# Altium PCB PCB1.PcbDoc
Units mm, origin at the board's own origin, x right, y up, seen from the top; angles counter-clockwise.
Board outline 209.93 x 191.52 mm, 2 copper layers (Top Layer, Bottom Layer); 51 components, 46 nets, 178 pads, 24 vias.
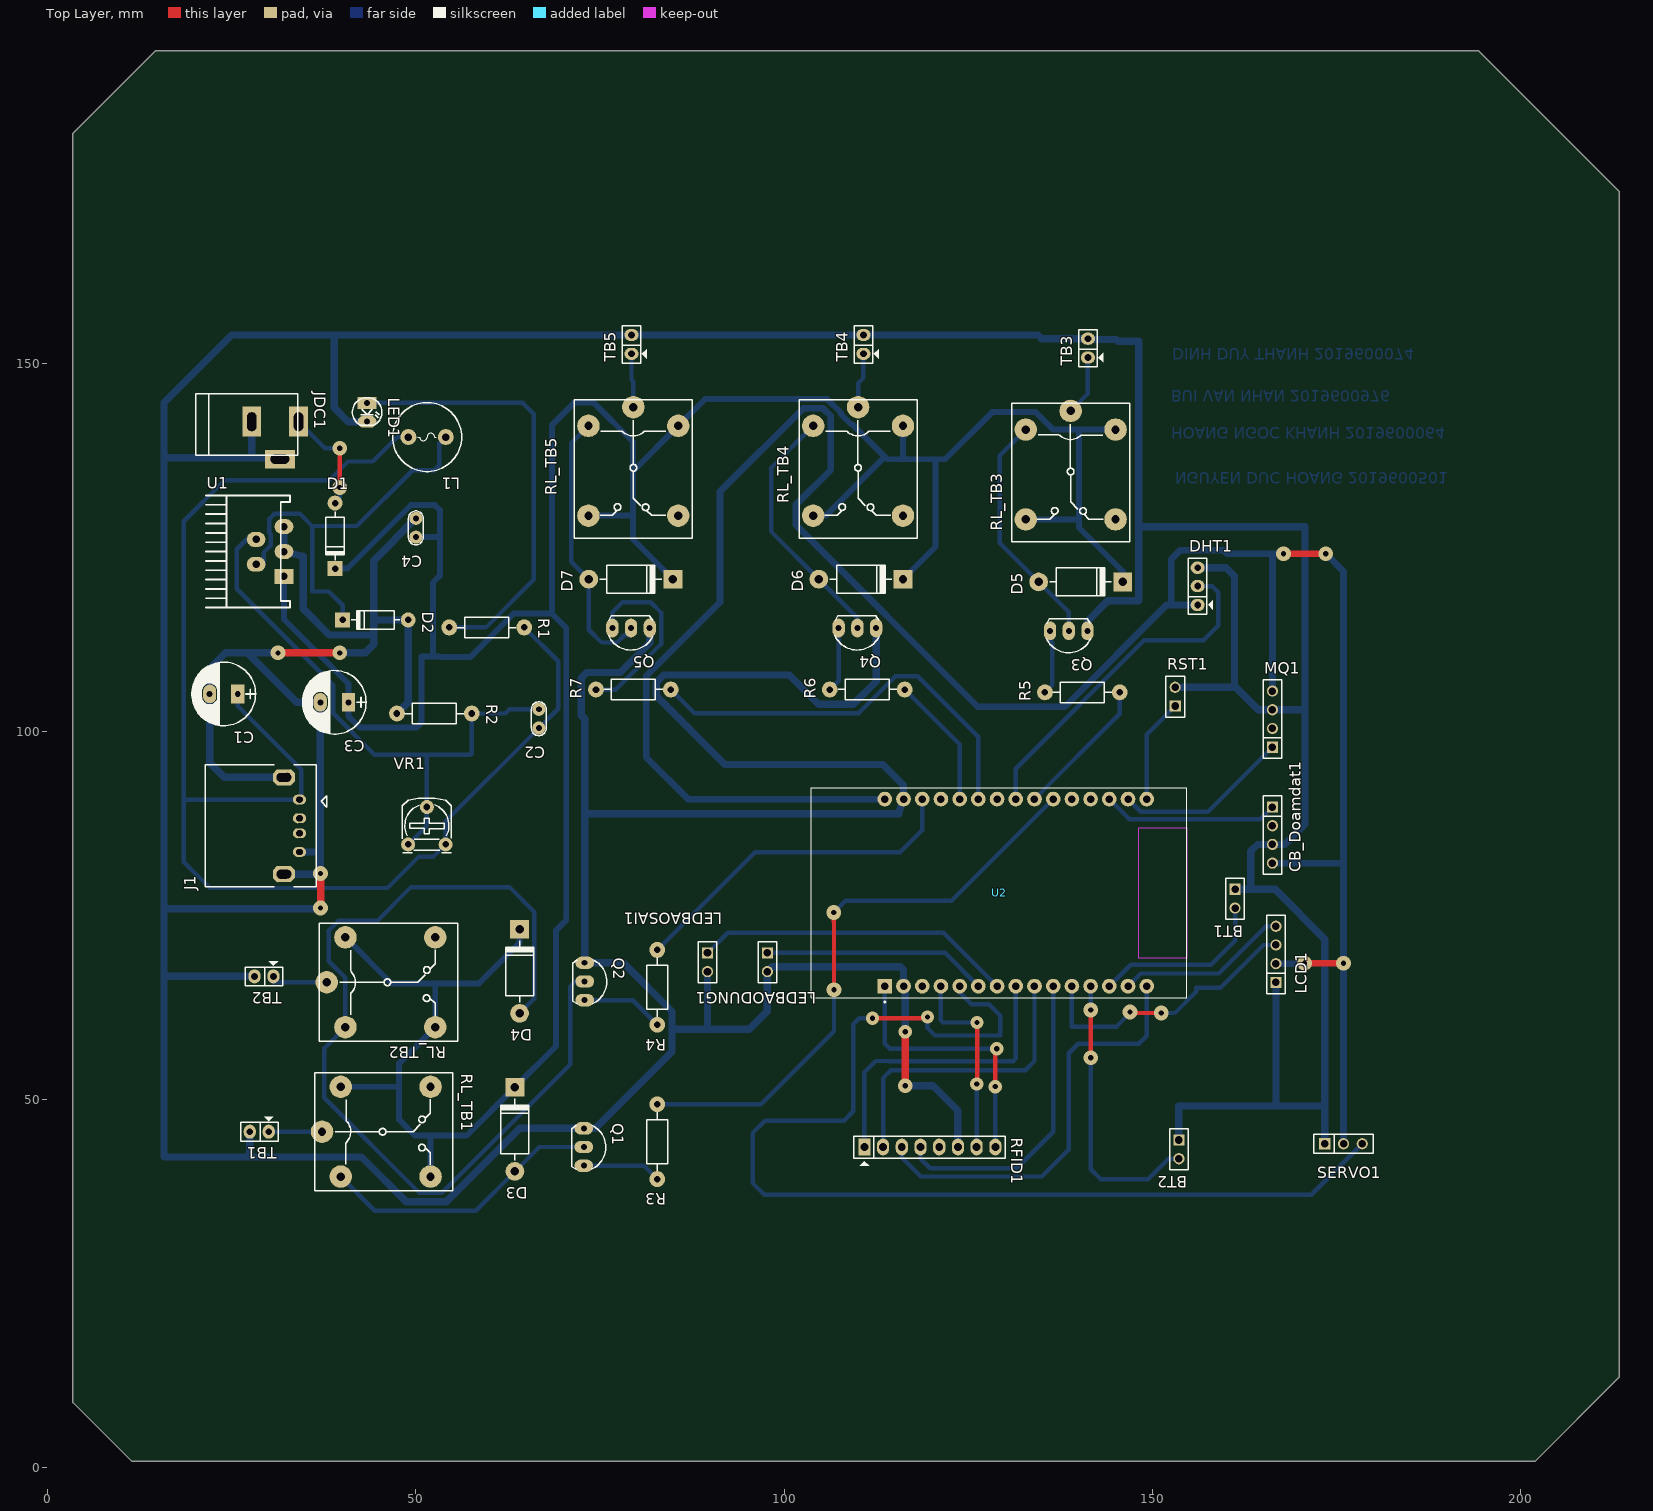
[diagram p0: Top Layer view]
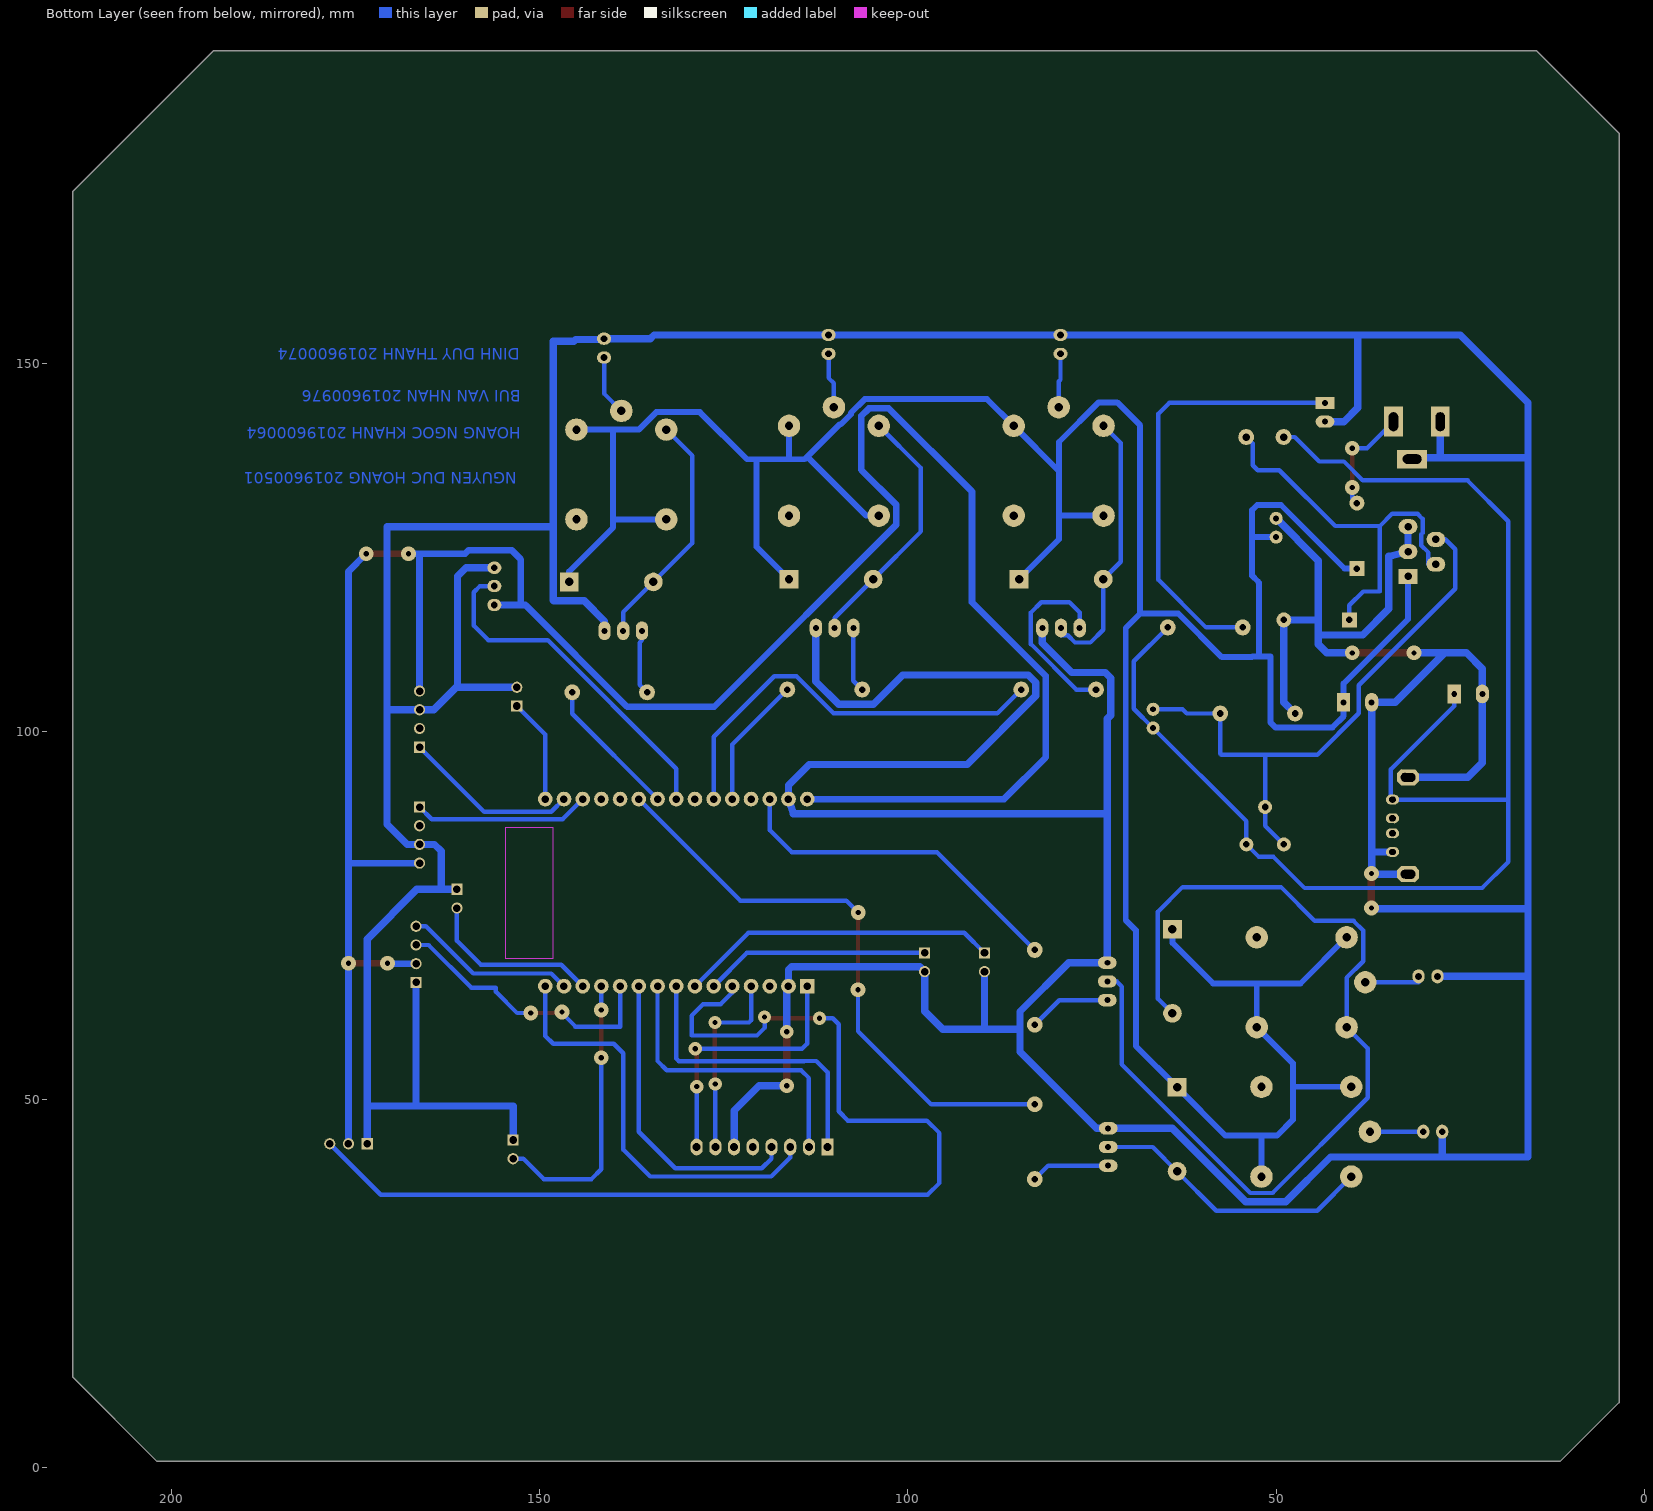
[diagram p1: Bottom Layer view, seen from below]
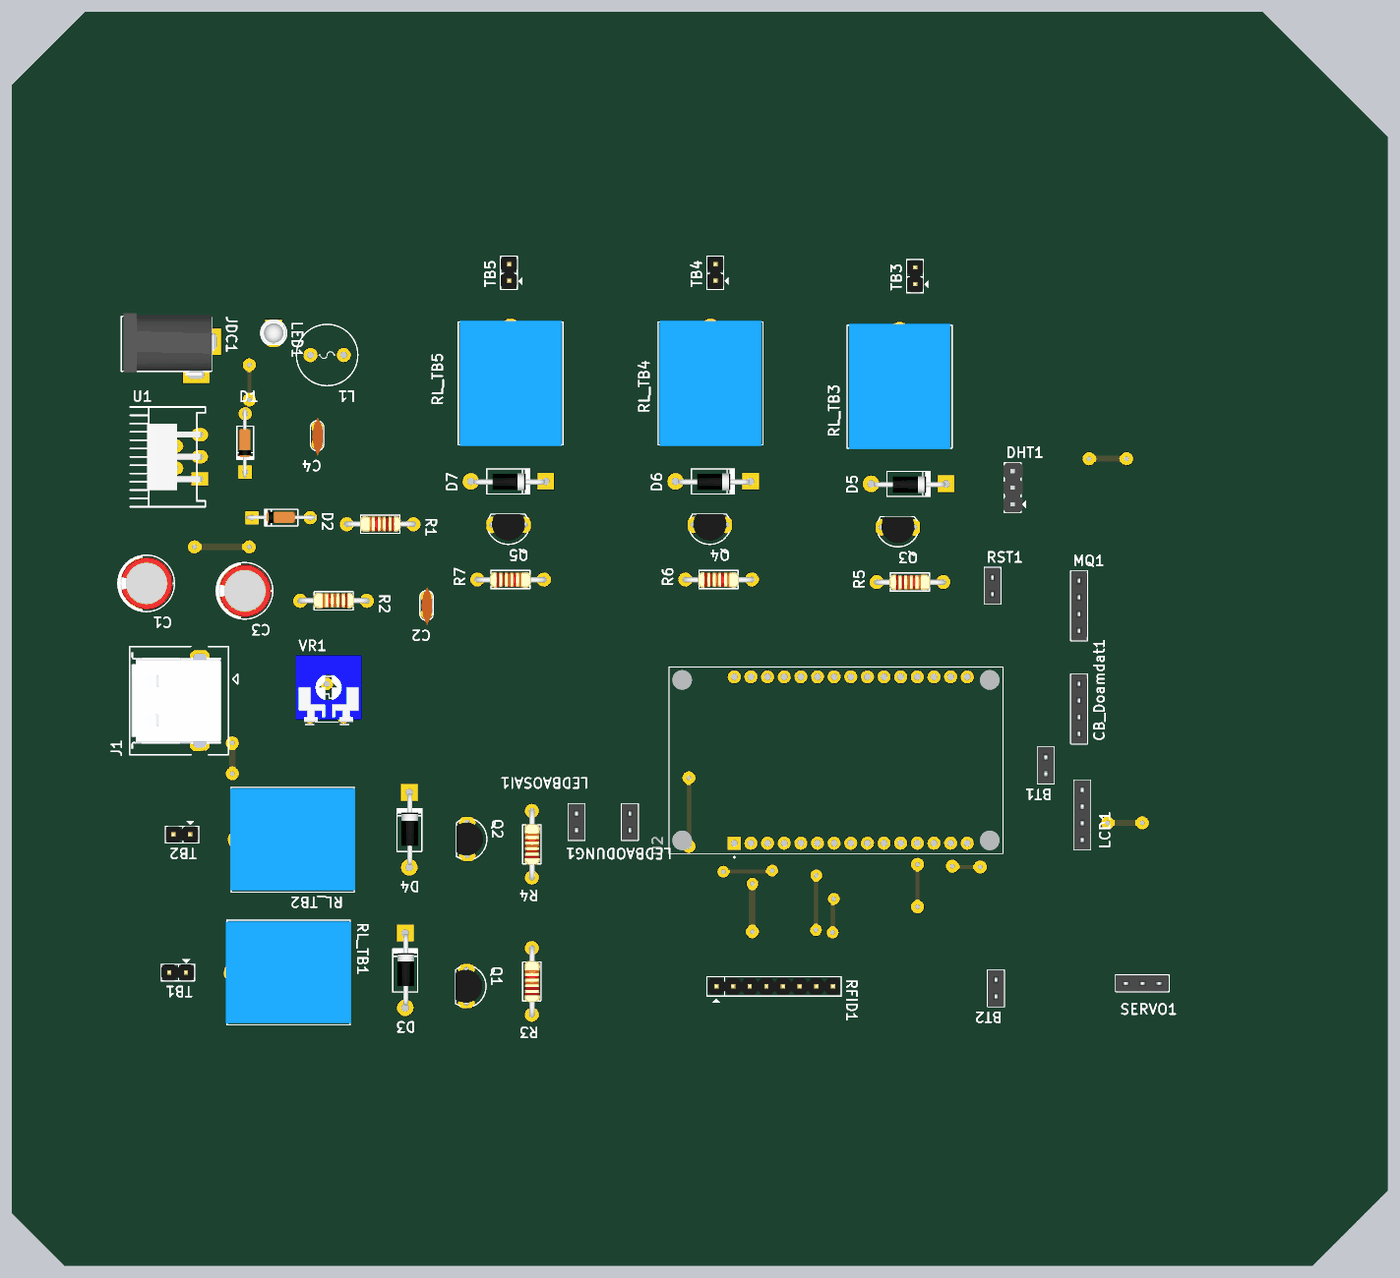
[diagram p2: 3D render of the assembled board from above, using the file's embedded part models]

## Layer stack, top to bottom
Top Layer: signal copper 0.0356
Dielectric: dielectric 0.32, FR-4, Dk 4.8
Bottom Layer: signal copper 0.0356

## Board outline
3.429,8.89 11.43,0.889 201.93,0.889 213.36,12.319 213.36,173.355 194.31,192.405 14.605,192.405 3.429,181.229

## Design rules (kind name [scope] priority, off if disabled: settings)
Clearance [All] p1: gap=0.4
PolygonConnect [All] p1: connectstyle=Relief reliefconductorwidth=0.254 reliefentries=4 polygonreliefangle="90 Angle"
RoutingLayers [All] p1: top layer_v5=FALSE bottom layer_v5=TRUE
RoutingVias [All] p1: holewidth=0.711 width=1.27 viastyle="Through Hole" minholewidth=0.711 minwidth=1.27 maxholewidth=0.711 maxwidth=1.27
SilkscreenOverComponentPads [All] p1: minsilkscreentomaskgap=0.254
SolderMaskExpansion [All] p1: expansion=0.102
Width GND [InNet('GND')] p1: maxlimit=1 minlimit=1 preferedwidth=1
Width VCC [InNet('VCC')] p2: maxlimit=0.9 minlimit=0.9 preferedwidth=0.9
Width 12V [InNet('+12')] p3: maxlimit=0.8 minlimit=0.8 preferedwidth=0.8
Width NET [All] p4: maxlimit=0.6 minlimit=0.6 preferedwidth=0.6
26 further rules are at their usual default settings.

## Components (designator, comment, footprint, x,y, rotation, side; value= is the part's Value field where it differs from the comment)
BT1 "JP2" JP2-C1T 161.218,78.569 r270 top
BT2 "JP2" JP2-C1T 153.598,44.533 r270 top
C1 "220uF/50V" CP1.5/3.4 25.808,105.104 r180 top
C2 "104" CN1 66.696,103.017 r270 top
C3 "220uF/50V" CP1.5/3.4 40.822,103.969 r180 top
C4 "104" CN1 49.998,128.932 r270 top
CB_Doamdat1 "JP4" JP4-C1T 166.298,89.745 r270 top
D1 "1N4007" D1A 39.016,131.012 r90 top
D2 "1N5448" D1A 48.95,115.145 r0 top
D3 "1N4007" D2A 63.438,51.702 r270 top
D4 "1N4007" D2A 64.073,73.165 r270 top
D5 "1N4007" D2A 145.98,120.304 r180 top
D6 "1N4007" D2A 116.135,120.685 r180 top
D7 "1N4007" D2A 84.893,120.685 r180 top
DHT1 "Jumper 3" JP3 156.138,119.717 r90 top
J1 "8492121" USB-C1 29.872,87.324 r90 top
JDC1 "Jac DC" DC-IN 30.888,139.521 r0 top
L1 "330uH" L01 51.522,139.981 r180 top
LCD1 "JP4" JP4-C1T 166.772,65.933 r90 top
LED1 "LED" LED-3 43.362,144.609 r270 top
LEDBAODUNG1 "JP2" JP2-C1T 97.718,69.933 r270 top
LEDBAOSAI1 "JP2" JP2-C1T 89.59,69.933 r270 top
MQ1 "JP4" JP4-C1T 166.298,97.873 r90 top
Q1 "C1815" QTO-92 72.792,43.581 r270 top
Q2 "C1815" QTO-92 72.919,66.06 r270 top
Q3 "C1815" QTO-92 138.642,113.669 r180 top
Q4 "C1815" QTO-92 109.94,114.05 r180 top
Q5 "C1815" QTO-92 79.206,114.05 r180 top
R1 "330" R1/2W 54.538,114.129 r0 top
R2 "330" R1/2W 47.426,102.445 r0 top
R3 "220" R1/2W 82.768,49.388 r270 top
R4 "220" R1/2W 82.768,70.343 r270 top
R5 "220" R1/2W 145.569,105.314 r180 top
R6 "220" R1/2W 116.359,105.695 r180 top
R7 "220" R1/2W 84.609,105.695 r180 top
RFID1 "JP8 PIN" JP8 110.892,43.581 r0 top
RL_TB1 "Relay1" RL_SPDT_10A 37.252,45.661 r0 top
RL_TB2 "Relay1" RL_SPDT_10A 37.887,65.949 r0 top
RL_TB3 "Relay1" RL_SPDT_10A 138.896,143.53 r270 top
RL_TB4 "Relay1" RL_SPDT_10A 110.035,144.038 r270 top
RL_TB5 "Relay1" RL_SPDT_10A 79.523,144.038 r270 top
RST1 "JP2" JP2-C1T 153.09,103.461 r90 top
SERVO1 "JP3" JP3-C1T 173.41,44.025 r0 top
TB1 "Jumper 2" JP2 30.013,45.661 r180 top
TB2 "Jumper 2" JP2 30.648,66.743 r180 top
TB3 "Jumper 2" JP2 141.245,150.769 r90 top
TB4 "Jumper 2" JP2 110.765,151.277 r90 top
TB5 "Jumper 2" JP2 79.269,151.277 r90 top
U1 "LM2976" DIP5-T 27.84,124.408 r90 top
U2 "ESP32-DEVKIT-V1" MODULE_ESP32_DEVKIT_V1 129.18,78.125 r90 top
VR1 "10K" VR 48.95,84.665 r0 top

## Footprints (in the part's own frame and the unit in brackets; to place one, negate y for a bottom-side part, rotate by r counter-clockwise, add the part's x,y. Pads: shape width x height; smd on the part's side, far side on the other; paste and mask are expansions set on the pad)
CN1 [mil]
  round 70 hole 31: 1(0,0) 2(100,0)
  silkscreen extent -40,-40 141,40, body extent -60,-30 170,37, height 265
CP1.5/3.4 [mil] "Tu hoa 220->470uF,16V, 470uF/16V,25V"
  rect 70x100 hole 32: 1(0,0)
  oval 70x100 hole 32: 2(150,0)
  silkscreen extent -95,-170 245,170, body extent -85,-157 230,157, height 446
D1A [mil] "Diode 1A, W 100mil, L 350mil"
  round 80 hole 35: 1(0,0)
  rect 80x80 hole 35: 2(-350,0)
  silkscreen extent -305,-50 -45,50, body extent -386,-33 34,36, height 84
D2A [mil] "Diode 2A, W 150mil, L 450mil"
  round 100 hole 45: 1(450,0)
  rect 100x100 hole 45: 2(0,0)
  silkscreen extent 61,-75 391,75, body extent 5,-47 435,54, height 100
DC-IN [mil] "Jac DC input"
  rect 100x160 hole 50 slot 100 at 90 deg: 1(125,100) 2(-125,100)
  rect 160x100 hole 50 slot 100 at 0 deg: 3(25,-100)
  silkscreen extent -425,-80 120,250, body extent -410,-105 134,269, height 434
DIP5-T [mil]
  rect 80x100 hole 40: 1(-132,-167.09)
  oval 80x100 hole 40: 2(-67,-18) 3(1,-167) 4(66,-18) 5(134,-167)
  round 59.06 on Top Paste: ""(1,100)
  silkscreen extent -299,-200 301,250, body extent -199,-175 201,150, height 859
JP2 [mil]
  oval 65x75 hole 36: 1(0,0) 2(101,0)
  silkscreen extent -50,-81 150,50, body extent -48,-50 148,48, height 323
JP2-C1T [mm] "2 row, straight, gold plating"
  rect 1.52x1.52 hole 1.02: 1(0,0)
  round 1.52 hole 1.02: 2(2.54,0)
  silkscreen extent -1.52,-1.27 4.06,1.27, body extent -1.52,-1.25 4.06,1.25, height 8.51
JP3 [mil] "Jumper 3"
  oval 65x75 hole 36: 1(-100,0) 2(1,0) 3(99,0)
  silkscreen extent -150,-81 150,50, body extent -150,-60 150,55, height 355
JP3-C1T [mm] "3 row, straight, gold plating"
  rect 1.52x1.52 hole 1.02: 1(0,0)
  round 1.52 hole 1.02: 2(2.54,0) 3(5.08,0)
  silkscreen extent -1.52,-1.27 6.6,1.27, body extent -1.52,-1.25 6.6,1.25, height 8.51
JP4-C1T [mm] "4 row, straight, gold plating"
  rect 1.52x1.52 hole 1.02: 1(0,0)
  round 1.52 hole 1.02: 2(2.54,0) 3(5.08,0) 4(7.62,0)
  silkscreen extent -1.52,-1.27 9.14,1.27, body extent -1.52,-1.25 9.14,1.25, height 8.51
JP8 [mil] "JP8"
  rect 65x90 hole 42: 1(0,0)
  oval 65x90 hole 42: 2(100,0) 3(200,0) 4(300,0) 5(400,0) 6(500,0) 7(600,0) 8(700,0)
  silkscreen extent -56,-100 752,57, body extent -48,-50 748,48, height 323
L01 [mil] "Inductor"
  round 85 hole 40: 1(-100,0) 2(100,0)
  silkscreen extent -184,-184 184,184
LED-3 [mil] "LED 2 PIN, 3ly Only colour"
  rect 65x100 hole 32: 1(0,0)
  oval 65x100 hole 32: 2(100,0)
  silkscreen extent -29,-78 118,79, body extent -25,-75 113,75, height 217
MODULE_ESP32_DEVKIT_V1 [mm]
  rect 2x2 / inner round 2 / far side rect 2x2 hole 1.02: 1(-12.7,15.515)
  round 2 hole 1.02: 2(-12.7,12.975) 3(-12.7,10.435) 4(-12.7,7.895) 5(-12.7,5.355) 6(-12.7,2.815) 7(-12.7,0.275) 8(-12.7,-2.265) 9(-12.7,-4.805) 10(-12.7,-7.345) 11(-12.7,-9.885) 12(-12.7,-12.425) 13(-12.7,-14.965) 14(-12.7,-17.505) 15(-12.7,-20.045) 16(12.7,-20.045) 17(12.7,-17.505) 18(12.7,-14.965) 19(12.7,-12.425) 20(12.7,-9.885) 21(12.7,-7.345) 22(12.7,-4.805) 23(12.7,-2.265) 24(12.7,0.275) 25(12.7,2.815) 26(12.7,5.355) 27(12.7,7.895) 28(12.7,10.435) 29(12.7,12.975) 30(12.7,15.515)
  round 3 on Top Paste: ""(-12.28,23.475) ""(-12.28,-23.475) ""(12.23,23.475) ""(12.23,-23.475)
  Keep-Out Layer region: 8.78,-25.475 -8.91,-25.475 -8.91,-18.985 8.78,-18.985
  Keep-Out Layer region: 8.78,-25.475 -8.91,-25.475 -8.91,-18.985 8.78,-18.985
  silkscreen extent -14.95,-25.47 14.23,25.47
QTO-92 [mil] "TO-92"
  oval 66x100 hole 32: 1(-100,0) 2(0,0) 3(100,0)
  silkscreen extent -117,-65 120,118, body extent -109,-66 109,95, height 245
R1/2W [mil] "R 1/2W, 2 pin, 300mil"
  round 85 hole 35: 1(0,0) 2(400,0)
  silkscreen extent 42,-55 356,55, body extent -12,-45 414,49, height 91
RL_SPDT_10A [mil] "Relay SPDT, 5 pin, 10A,W 650mil, L 800mil, H 800mil"
  round 120 hole 45: 1(0,0) 2(580,240) 3(580,-240) 4(100,-240) 5(100,240)
  silkscreen extent -40,-315 700,315, body extent -46,-304 706,306, height 602
USB-C1 [mm] "THT, USB 2.0 A Connector, 4Pin, Body 15.8 x14.5mm"
  oval 1.35x1.8 hole 0.8 slot 0.9 at 90.92 deg rot 0.92: 1(3.429,-4.318) 2(0.889,-4.318) 3(-1.143,-4.318) 4(-3.683,-4.318)
  oct 2.2x3 hole 1.2 slot 2 at 90.92 deg rot 0.92: 4(-6.697,-2.206) 4(6.443,-2.206)
  silkscreen extent -8.38,-8 8.13,8.51, body extent -8.03,-5.46 7.77,8.24, height 6.97
VR [mil] "Resistor Variable"
  round 75 hole 35: 1(0,0) 2(100,200) 3(200,0)
  silkscreen extent -31,-44 231,246, body extent -87,-30 307,372, height 165

## Part data
BT1 BT2 CB_Doamdat1 LCD1 LEDBAODUNG1 LEDBAOSAI1 MQ1 RST1 SERVO1: "WR-PHD 2.54 mm Angled Socket Header"
C1 C3: library part CP4, "Cap 1000uF/16V - 220uF/50V"
C2 C4: library part CN1, "Cap np  1pF - 472pF"
D1 D2 D3 D4 D5 D6 D7: library part D1A, "Diode 1A"
DHT1: library part JP3
J1: library part USB-4, "THT USB 2.0 A Connector WE-EPLE"
JDC1: library part DCIN, "Jac DC input"
L1: library part L1, "Inductor"
LED1: "LED Single colour Green and Red"
Q1 Q2 Q3 Q4 Q5: "NPN 600mW, ECB"
R1 R2 R3 R4 R5 R6 R7: library part R1/4W, "Resistor 1/4W"
RFID1: library part JP8
RL_TB1 RL_TB2 RL_TB3 RL_TB4 RL_TB5: library part "Relay 1", "Relay SPDT,10A - 12VDC 5 Pin"
TB1 TB2 TB3 TB4 TB5: library part "JP 2"
U1: library part LM2596
U2: "Dual core, Wi-Fi: 2.4 GHz up to 150 Mbits/s,BLE (Bluetooth Low Energy) and legacy Bluetooth, 32 bits, Up to 240 MHz"
VR1: library part VR, "Var Resistor"

## Via types
v1: diameter 2, hole 0.711, Top Layer to Bottom Layer, 17 vias
v2: diameter 1.8, hole 0.711, Top Layer to Bottom Layer, 7 vias

## Nets (pads, with @x,y where several pads share a name; then routed paths per layer and width w, separated by ;. In a path a pad name is that pad's centre, name@x,y a point inside that pad or via, vN(x,y) a via of type N, cw(c..) or ccw(c..) an arc to the next point about the centre after c; other vN are vias at no path point)
3V3: RFID1.8 U2.1 | length 36.4
  Top Layer w0.6: v2(128.672,51.78) v2@128.672,56.751
  Bottom Layer w0.6: U2.1 113.665,57.63 114.369,56.926 v2(128.847,56.926) ; RFID1.8 v2(128.672,51.78)
+12: C3.1 C4.2 D1.2 D3.2 D4.2 D5.2 D6.2 D7.2 RL_TB1.3 RL_TB1.5 RL_TB2.3 RL_TB2.5 RL_TB3.3 RL_TB3.5 RL_TB4.3 RL_TB4.5 RL_TB5.3 RL_TB5.5 U1.1 | length 467.5
  Bottom Layer w0.8: U1.1@32.338,121.055 U1.1 32.084,115.243 40.822,106.505 C3.1 40.822,102.089 42.346,100.565 50.093,100.565 50.779,101.251 50.779,110.207 52.296,110.207 ; D1.2 40.698,122.122 49.331,130.755 52.558,130.755 53.245,130.068 53.245,121.151 52.455,120.361 ; RL_TB1.5 47.649,51.757 ; RL_TB2.5 46.691,65.782 52.846,65.782 ; C4.2 53.183,126.392 ; RL_TB1.3@51.858,39.691 RL_TB1.3@51.984,39.691 ; RL_TB1.3 RL_TB1.3@51.984,39.691 ; 52.296,120.202 52.296,110.207 ; 53.189,110.207 52.296,110.207 ; 53.3,110.096 57.363,110.096 63.276,116.009 68.457,116.009 ; D4.2 64.073,71.307 58.547,65.782 52.846,65.782 ; RL_TB5.3 79.413,129.306 79.47,129.363 ; D7.2 79.47,126.108 79.47,129.363 ; RL_TB4.3 105.656,129.306 113.659,137.309 ; 116.131,137.356 RL_TB4.5 ; D6.2 120.54,125.09 120.54,136.958 ; 116.529,136.958 115.883,136.958 ; RL_TB3.3 139.867,128.798 140.027,128.958 ; RL_TB3.5 140.027,140.99 ; D5.2 145.98,121.722 140.027,127.675 140.027,128.958 ; RL_TB1.3@51.984,39.691 51.984,45.107 53.471,45.107 53.482,45.118 ; 52.846,65.782 52.619,65.555 RL_TB2.3 47.717,54.951 47.717,47.278 49.877,45.118 53.482,45.118 ; 53.482,45.118 56.854,45.118 D3.2 69.041,57.305 69.041,73.006 70.413,74.378 70.413,114.053 68.457,116.009 ; 68.457,116.009 68.457,141.561 71.581,144.685 74.096,144.685 79.47,139.311 79.47,135.349 ; 79.47,129.363 79.47,135.349 ; 79.47,135.349 RL_TB5.5 89.243,145.122 105.846,145.122 107.711,143.257 107.711,143.075 109.072,141.714 109.254,141.714 113.659,137.309 ; 113.659,137.309 114.01,136.958 115.883,136.958 ; 115.883,136.958 120.54,136.958 ; 120.54,136.958 121.832,136.958 128.238,143.364 134.155,143.364 136.529,140.99 140.027,140.99 ; 140.027,128.958 140.027,140.99
BUTTON1: BT1.2 U2.13 | length 24.1
  Bottom Layer w0.6: U2.13 147.053,68.333 157.967,68.333 161.218,71.584 BT1.2
BUTTON2: BT2.2 U2.12 | length 38.6
  Top Layer w0.6: v1@141.605,55.728 v1(141.629,55.704) v1(141.629,62.175)
  Bottom Layer w0.6: U2.12 141.605,62.199 v1(141.629,62.175) ; v1(141.629,55.704) 141.629,40.548 142.945,39.232 149.432,39.232 152.193,41.993 BT2.2
D16: LEDBAODUNG1.1 U2.6 | length 30.5
  Bottom Layer w0.6: LEDBAODUNG1.1 121.857,69.933 U2.6
D17: LEDBAOSAI1.1 U2.7 | length 43.5
  Bottom Layer w0.6: LEDBAOSAI1.1 92.347,72.69 121.64,72.69 U2.7
DHT: DHT1.2 U2.23 | length 47.3
  Bottom Layer w0.6: U2.23 131.445,94.948 148.906,112.409 156.97,112.409 158.937,114.376 158.937,118.906 158.101,119.742 DHT1.2
DOAM: CB_Doamdat1.1 U2.18 | length 24
  Bottom Layer w0.6: U2.18 146.876,88.094 164.647,88.094 CB_Doamdat1.1
EN: RST1.1 U2.16 | length 14.2
  Bottom Layer w0.6: U2.16 149.225,99.596 RST1.1
GND: BT1.1 BT2.1 C1.2 C3.2 C4.1 CB_Doamdat1.3 D2.1 DHT1.3 J1.4 JDC1.2 JDC1.3 LCD1.1 LED1.2 LEDBAODUNG1.2 LEDBAOSAI1.2 MQ1.3 Q1.1 Q2.1 Q3.1 Q4.1 Q5.1 R2.1 RFID1.6 RST1.2 SERVO1.1 TB1.2 TB2.2 TB3.2 TB4.2 TB5.2 U1.3 U1.5 U2.2 U2.29 | length 1068.6
  Top Layer w1: v1(31.273,110.675) v1(39.642,110.675) ; v1(37.058,76.035) v1(37.058,80.734) ; v1(116.427,51.891) v2(116.427,59.238)
  Bottom Layer w1: 15.849,137.191 27.713,137.191 ; 15.979,66.743 TB2.2 ; 27.448,42.247 TB1.2 ; JDC1.2 27.713,140.791 27.713,137.191 ; v1(31.273,110.675) 27.105,110.675 ; JDC1.3 31.313,137.191 27.713,137.191 ; J1.4@32.078,80.627 36.951,80.627 v1(37.058,80.734) 37.012,80.78 C3.2 33.811,103.969 27.105,110.675 ; J1.4@32.078,93.767 23.973,93.767 21.998,95.742 C1.2 21.998,108.53 24.143,110.675 27.105,110.675 ; U1.5 U1.3 34.7,123.781 34.7,116.644 38.252,113.092 44.272,113.092 ; J1.4@33.965,83.637 34.19,83.641 36.843,83.641 ; v1@36.975,75.952 15.787,75.952 ; 38.911,153.781 38.911,143.939 40.781,142.069 LED1.2 ; v1(39.642,110.675) 43.004,110.675 43.113,110.675 44.272,111.833 44.272,113.092 ; 44.316,115.145 D2.1 48.95,103.969 R2.1 ; 49.84,36.141 54.128,36.141 64.108,46.121 Q1.1 74.375,46.121 84.764,56.51 84.764,59.573 ; 49.978,36.141 48.703,36.141 42.616,42.228 15.787,42.228 15.787,75.952 ; C4.1 44.272,123.206 44.272,113.092 ; Q2.1@72.928,68.6 Q2.1 ; 75.366,68.6 76.066,68.6 ; Q5.1 81.746,112.021 77.733,108.008 73.182,108.008 72.445,107.271 72.445,102.191 72.928,101.708 72.928,88.508 ; 89.59,59.638 LEDBAOSAI1.2 ; Q4.1 112.48,106.793 109.402,103.715 104.652,103.715 100.69,107.677 83.646,107.677 82.629,106.66 82.629,104.834 91.952,95.511 113.39,95.511 116.205,92.696 U2.29 115.545,88.831 73.25,88.831 72.928,88.508 ; v1(116.427,51.891) 120.207,51.891 123.592,48.506 RFID1.6 ; v2(116.427,59.238) 116.427,65.203 U2.2 116.205,67.64 115.779,68.066 98.391,68.066 LEDBAODUNG1.2 97.718,62.037 95.254,59.573 84.764,59.573 ; Q3.1 141.182,114.972 143.946,117.736 148.072,117.736 ; 145.105,153.228 141.351,153.228 TB3.2 134.98,153.334 134.472,153.842 TB4.2 TB5.2 24.987,153.842 15.787,144.642 15.787,75.952 ; 145.354,152.979 148.162,152.979 148.162,127.68 ; 148.162,117.826 148.162,127.68 ; RST1.2 161.3,106.001 ; BT2.1 153.598,49.157 173.069,49.157 ; DHT1.3 159.999,122.232 161.142,121.089 161.142,106.159 161.3,106.001 ; BT1.1 163.369,78.569 ; 166.772,49.306 LCD1.1 ; 170.407,102.953 MQ1.3 164.348,102.953 161.3,106.001 ; SERVO1.1 173.41,49.02 ; 173.41,49.259 173.41,71.813 166.654,78.569 163.369,78.569 ; Q2.1 76.066,68.6 ; Q2.1 72.919,88.5 72.928,88.508 ; 76.066,68.6 78.147,68.6 84.764,61.983 84.764,59.573 ; 148.162,127.68 148.274,127.792 150.63,127.792 151.376,127.792 170.718,127.792 170.718,87.395 167.988,84.665 CB_Doamdat1.3 164.266,84.665 163.369,83.768 163.369,78.569
IRQ: RFID1.5
MISO: RFID1.4 U2.10 | length 42
  Bottom Layer w0.6: RFID1.4 118.512,42.002 119.816,40.698 131.576,40.698 136.525,45.646 U2.10
MOSI: RFID1.3 U2.15 | length 58.1
  Bottom Layer w0.6: RFID1.3 115.972,42.154 118.546,39.58 134.98,39.58 138.637,43.238 138.637,56.299 139.924,57.586 148.152,57.586 149.225,58.659 149.225,61.163 149.225,61.608 U2.15
MQ135: MQ1.1 U2.17 | length 24
  Bottom Layer w0.6: U2.17 148.4,89.11 157.535,89.11 MQ1.1
NetC1_1: C1.1 C2.2 J1.1 L1.2 R1.2 VR1.3 | length 200.8
  Bottom Layer w0.6: 18.462,82.311 18.462,128.559 23.996,134.093 38.22,134.093 40.788,136.661 44.127,136.661 47.446,139.981 L1.2 ; C1.1 25.808,103.461 34.415,94.854 34.415,90.978 J1.1 18.517,90.753 18.514,90.75 18.514,82.259 22.026,78.747 46.131,78.747 50.351,82.967 52.332,82.967 VR1.3 54.03,87.811 C2.2 69.308,103.089 69.308,109.519 R1.2
NetC2_1: C2.1 R2.2 U1.4 VR1.1 VR1.2 | length 79.9
  Bottom Layer w0.6: U1.4 27.028,126.084 25.685,124.741 25.685,119.373 38.765,106.293 38.765,102.47 44.415,96.82 51.639,96.82 ; VR1.1 51.49,87.205 VR1.2 51.49,96.671 51.639,96.82 ; 57.417,96.82 51.639,96.82 ; 57.586,96.989 R2.2 62.133,102.445 62.705,103.017 C2.1
NetD1_1: D1.1 JDC1.1 | length 14.8
  Top Layer w0.6: v1(39.652,133.12) v1(39.652,138.471)
  Bottom Layer w0.6: JDC1.1 37.653,138.471 v1(39.652,138.471) ; D1.1 39.652,131.648 v1(39.652,133.12)
NetD2_2: D2.2 L1.1 U1.2 | length 54.9
  Bottom Layer w0.6: U1.2 29.316,122.706 29.316,124.289 30.281,125.254 30.281,126.778 ; 30.103,126.956 30.103,128.861 30.789,129.547 34.249,129.547 35.9,127.896 ; D2.2 40.06,117.126 38.18,119.006 35.9,119.006 35.9,126.53 35.9,127.896 ; L1.1 53.179,139.098 53.179,136.16 52.506,135.487 49.568,135.487 41.977,127.896 37.607,127.896 37.266,127.896 35.9,127.896
NetD3_1: D3.1 Q1.2 RL_TB1.4 | length 38.5
  Bottom Layer w0.6: RL_TB1.4 44.416,34.941 58.107,34.941 D3.1 66.747,43.581 Q1.2
NetD4_1: D4.1 Q2.2 RL_TB2.4 | length 129.9
  Bottom Layer w0.6: D4.1 66.044,63.706 66.044,75.521 62.691,78.874 49.331,78.874 44.734,74.276 39.476,74.276 38.18,72.981 38.18,68.815 40.427,66.569 RL_TB2.4 37.545,56.972 37.545,50.271 50.475,37.341 53.493,37.341 70.946,54.794 70.946,65.361 71.645,66.06 Q2.2
NetD5_1: D5.1 Q3.2 RL_TB3.4 | length 32.7
  Bottom Layer w0.6: RL_TB3.4 129.275,137.466 129.275,125.579 D5.1 138.642,116.212 Q3.2
NetD6_1: D6.1 Q4.2 RL_TB4.4 | length 34.7
  Bottom Layer w0.6: RL_TB4.4 98.226,135.785 98.226,127.164 D6.1 109.94,115.45 Q4.2
NetD7_1: D7.1 Q5.2 RL_TB5.4 | length 37.5
  Bottom Layer w0.6: RL_TB5.4 71.099,139.17 71.099,123.049 D7.1 73.463,113.822 75.205,112.08 77.305,112.08 78.287,113.062 79.206,113.062 Q5.2
NetLED1_1: LED1.1 R1.1 | length 59.9
  Bottom Layer w0.6: LED1.1 64.509,144.609 65.977,143.141 65.977,120.601 59.505,114.129 R1.1
NetQ1_3: Q1.3 R3.2 | length 10.7
  Bottom Layer w0.6: Q1.3 80.955,41.041 R3.2
NetQ2_3: Q2.3 R4.2 | length 11.2
  Bottom Layer w0.6: Q2.3 79.431,63.52 R4.2
NetQ3_3: Q3.3 R5.2 | length 8.9
  Bottom Layer w0.6: R5.2 136.424,106.329 136.424,112.06 136.102,112.381 Q3.3
NetQ4_3: Q4.3 R6.2 | length 8.9
  Bottom Layer w0.6: R6.2 107.4,106.896 Q4.3
NetQ5_3: Q5.3 R7.2 | length 25.6
  Bottom Layer w0.6: R7.2 77.117,105.695 83.291,111.868 83.291,116.161 81.894,117.558 78.063,117.558 76.666,116.161 Q5.3
NetRL_TB1_1: RL_TB1.1 TB1.1 | length 7.2
  Bottom Layer w0.6: TB1.1 RL_TB1.1
NetRL_TB2_1: RL_TB2.1 TB2.1 | length 8
  Bottom Layer w0.6: TB2.1 30.648,65.945 34.646,65.945 34.65,65.949 RL_TB2.1
NetRL_TB3_1: RL_TB3.1 TB3.1 | length 8.2
  Bottom Layer w0.6: RL_TB3.1 141.245,145.88 TB3.1
NetRL_TB4_1: RL_TB4.1 TB4.1 | length 7.5
  Bottom Layer w0.6: RL_TB4.1 110.035,147.276 110.765,148.006 TB4.1
NetRL_TB5_1: RL_TB5.1 TB5.1 | length 7.3
  Bottom Layer w0.6: TB5.1 79.269,147.784 79.523,147.53 RL_TB5.1
OUTTB1: R7.1 U2.25 | length 57
  Bottom Layer w0.6: R7.1 87.834,102.47 110.088,102.47 115.117,107.5 118.14,107.5 126.365,99.274 U2.25
OUTTB2: R3.1 U2.21 | length 80.4
  Top Layer w0.6: 106.732,74.185 v1(106.732,75.41) ; v1(106.766,64.927) 106.766,74.151
  Bottom Layer w0.6: R3.1 96.841,49.388 106.766,59.313 v1(106.766,64.927) ; v1(106.732,75.41) 108.367,77.045 122.745,77.045 U2.21
OUTTB3: R5.1 U2.22 | length 19.3
  Bottom Layer w0.6: U2.22 145.569,102.409 R5.1
OUTTB4: R4.1 U2.28 | length 46.9
  Bottom Layer w0.6: R4.1 96.039,83.614 115.74,83.614 118.745,86.619 U2.28
OUTTB5: R6.1 U2.26 | length 18
  Bottom Layer w0.6: R6.1 123.825,98.229 U2.26
RST: RFID1.7 U2.4 | length 26.6
  Top Layer w0.6: v2(126.132,52.14) 126.188,52.196 v2(126.188,60.492)
  Bottom Layer w0.6: U2.4 121.285,60.777 121.57,60.492 v2(126.188,60.492) ; RFID1.7 v2(126.132,52.14)
SCK_RF: RFID1.2 U2.9 | length 41
  Bottom Layer w0.6: RFID1.2 113.432,52.943 114.494,54.005 132.725,54.005 133.985,55.265 U2.9
SCL: LCD1.4 U2.14 | length 23.5
  Bottom Layer w0.6: U2.14 148.399,67.139 159.016,67.139 165.43,73.553 LCD1.4
SDA: LCD1.3 U2.11 | length 38.3
  Top Layer w0.6: v1@146.933,61.873 v1(146.966,61.906) 147.092,61.779 v1(151.208,61.779)
  Bottom Layer w0.6: U2.11 139.065,59.934 145.129,59.934 146.966,61.771 v1(146.966,61.906) ; v1(151.208,61.779) 153.05,61.779 155.958,64.687 155.958,65.224 159.278,65.224 165.067,71.013 LCD1.3
SDA_RF: RFID1.1 U2.8 | length 41.3
  Bottom Layer w0.6: RFID1.1 110.892,53.717 112.439,55.264 114.016,55.264 114.038,55.242 131.084,55.242 131.445,55.603 U2.8
SERVO: SERVO1.3 U2.5 | length 152.5
  Top Layer w0.6: v2(111.994,61.066) 119.279,61.066 v2(119.451,61.238)
  Bottom Layer w0.6: v2(111.994,61.066) 110.208,61.066 109.391,60.249 109.391,48.424 108.142,47.175 97.413,47.175 95.711,45.473 95.711,38.691 97.319,37.084 171.549,37.084 SERVO1.3 ; v2(119.451,61.238) 119.451,59.749 120.481,58.719 129.346,58.719 129.346,61.426 127.814,62.958 125.42,62.958 123.825,64.553 U2.5
VCC: CB_Doamdat1.4 DHT1.1 LCD1.2 MQ1.4 SERVO1.2 U2.30 | length 330.4
  Top Layer w0.9: v1(167.813,124.146) v1(173.536,124.146) ; v1(170.645,68.53) v1(175.949,68.53)
  Bottom Layer w0.9: U2.30 86.939,90.825 81.279,96.484 81.279,107.546 91.292,117.558 91.292,132.569 102.594,143.872 105.272,143.872 106.313,142.831 106.313,135.525 101.553,130.766 101.553,128.099 126.293,103.359 138.111,103.359 151.929,117.177 152.534,117.177 ; 154.335,117.177 DHT1.1 152.534,117.177 ; CB_Doamdat1.4 175.794,82.125 ; MQ1.4 166.298,124.137 ; LCD1.2 v1@170.588,68.473 ; v1(167.813,124.146) 160.093,124.145 159.615,124.623 153.815,124.623 152.534,123.342 152.534,117.177 ; v1(173.536,124.146) 175.95,121.732 v1@175.95,68.53 ; SERVO1.2 v1@175.95,68.529
pads on no net: CB_Doamdat1.2 J1.2 J1.3 MQ1.2 RL_TB1.2 RL_TB2.2 RL_TB3.2 RL_TB4.2 RL_TB5.2 U1. U2. U2.3 U2.19 U2.20 U2.24 U2.27

## Other copper
Bottom Layer:
  text "DINH DUY THANH 2019600074" at 152.717,152.068 h1.52 r180
  text "BUI VAN NHAN 2019600976" at 152.59,146.353 h1.52 r180
  text "HOANG NGOC KHANH 2019600064" at 152.59,141.315 h1.52 r180
  text "NGUYEN DUC HOANG 2019600501" at 153.098,135.177 h1.52 r180